# Altium PCB Chemelec Feather M0 Basic rev A_bin5.PcbDoc
Units mm, origin at the board's own origin, x right, y up, seen from the top; angles counter-clockwise.
Board outline 53.59 x 24.77 mm, 2 copper layers (Top, Bottom), stack 1.57 mm thick; 21 components, 39 nets, 123 pads, 37 vias.
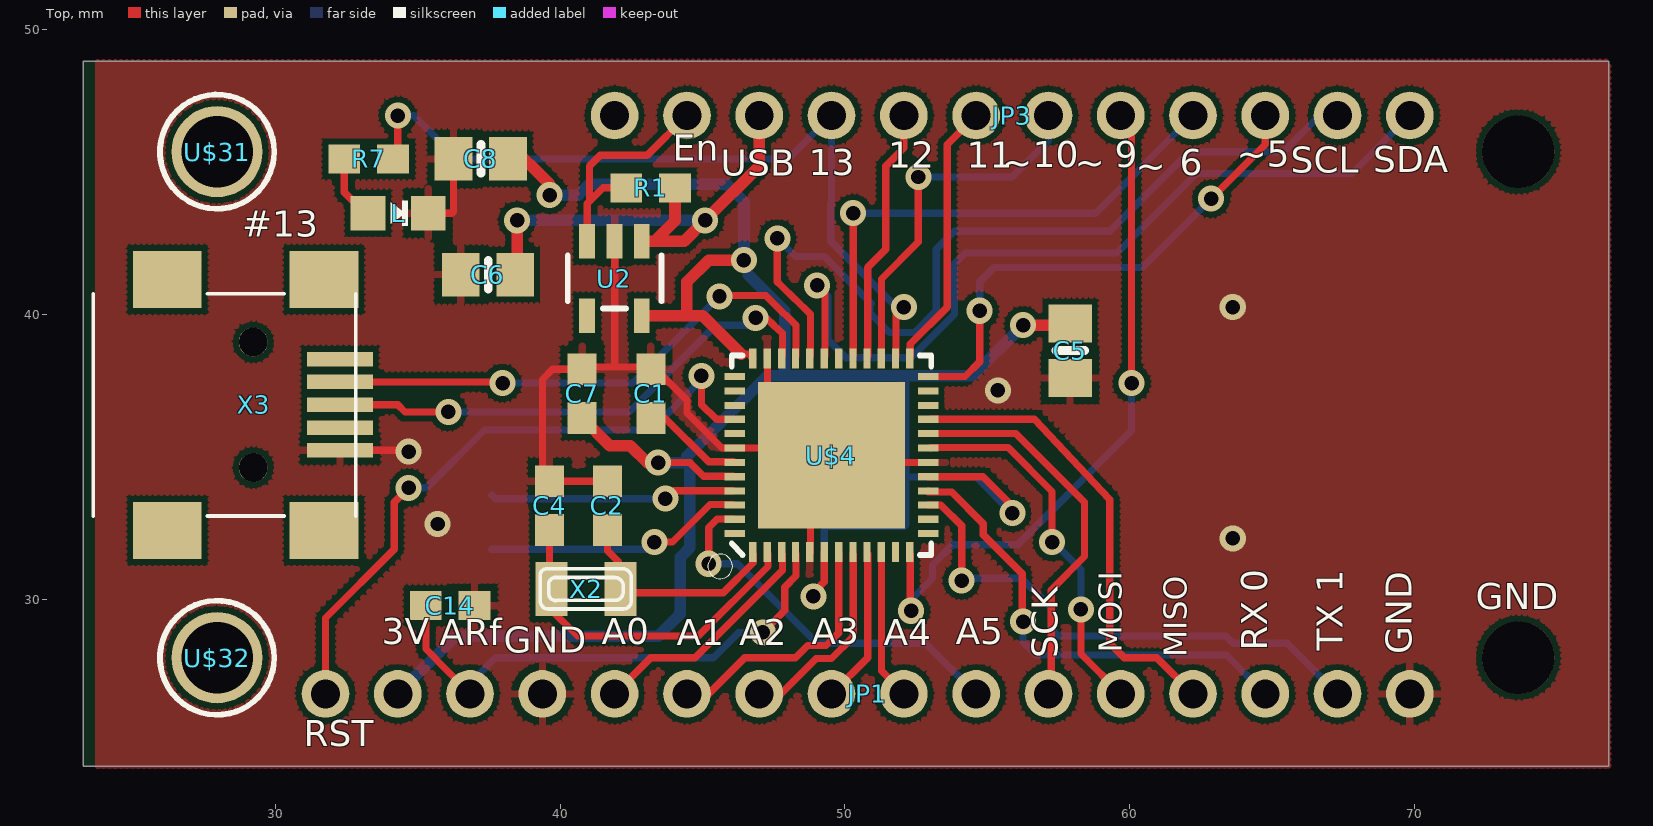
[diagram p0: Top view]
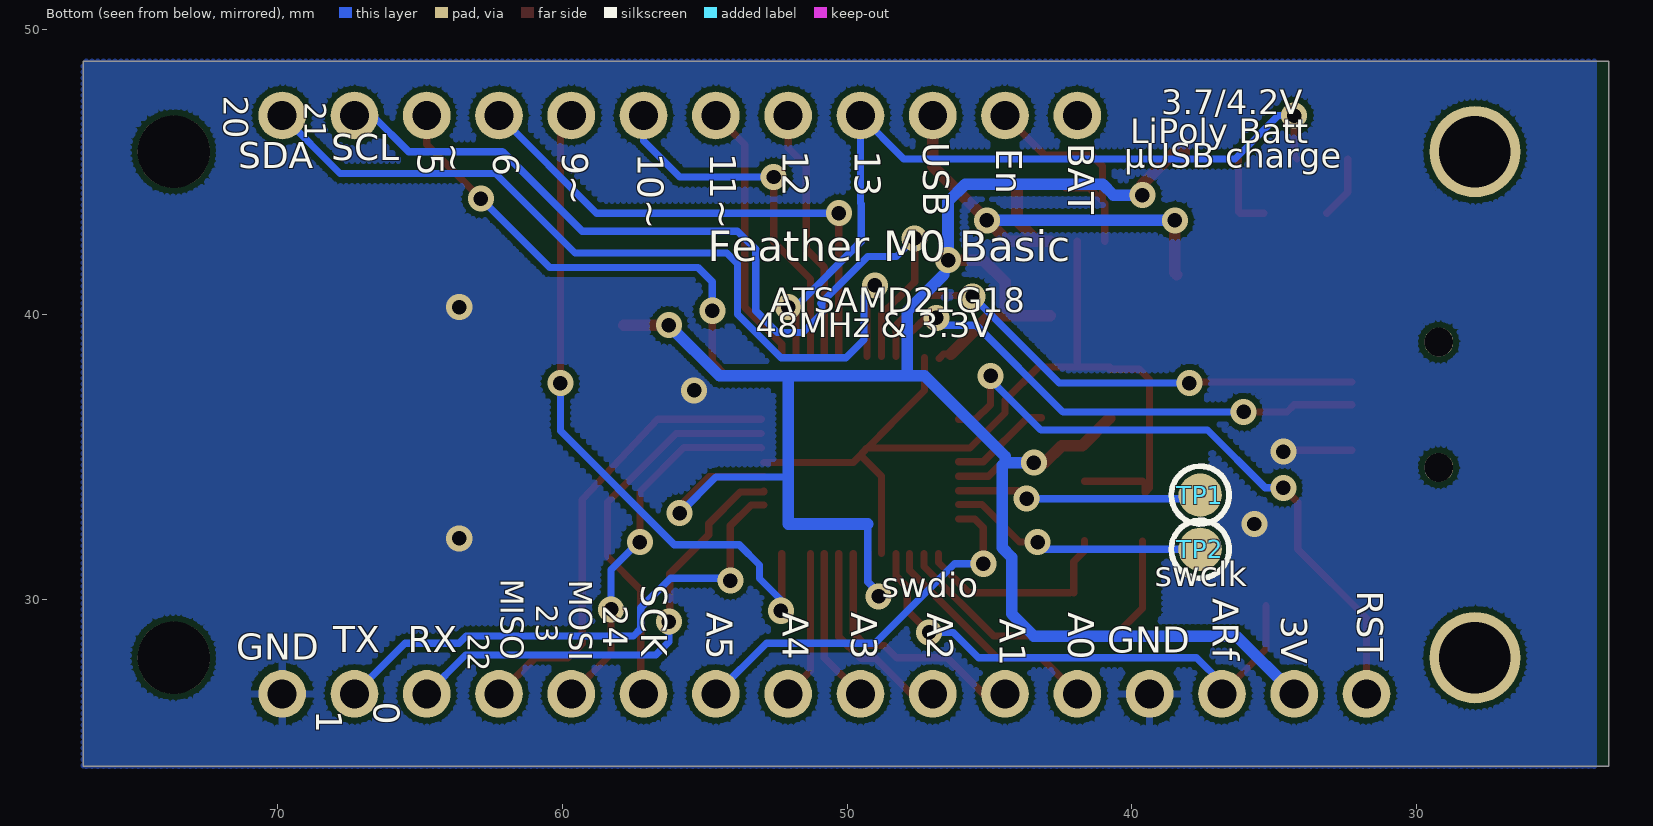
[diagram p1: Bottom view, seen from below]

## Layer stack, top to bottom
Top Solder: solder mask 0.0102, Solder Resist, Dk 3.5
Top: signal copper 0.035
Dielectric 1: core 1.5, FR-4, Dk 4.8
Bottom: signal copper 0.035
Bottom Solder: solder mask 0.0102, Solder Resist, Dk 3.5

## Board outline
23.241,48.895 76.835,48.895 76.835,25.273 76.835,24.13 75.692,24.13 23.241,24.13

## Design rules (kind name [scope] priority, off if disabled: settings)
Clearance mdViaVia [IsVia vs IsVia] p1: gap=0.203
Clearance mdPadVia [IsPad vs IsVia] p2: gap=0.203
Clearance mdPadPad [IsPad vs IsPad] p3: gap=0.203
Clearance mdWireVia [(InLayerClass('Signal Layers') AND IsTrack) vs IsVia] p4: gap=0.203
Clearance mdWirePad [(InLayerClass('Signal Layers') AND IsTrack) vs IsPad] p5: gap=0.203
Clearance mdWireWire [(InLayerClass('Signal Layers') AND IsTrack) vs (InLayerClass('Signal Layers') AND IsTrack)] p6: gap=0.203
Clearance [All] p7: gap=0.203
ComponentClearance [All] p1: gap=0.003 collisioncheckmode=3 verticalgap=0.003 showdistances=FALSE
HoleSize [All] p1: absolutevalues=TRUE maxlimit=2540 minlimit=0.394 maxpercent=80.000 minpercent=20.000
HoleToHoleClearance [All] p1: gap=0.203 allowstackedmicrovias=TRUE
MinimumSolderMaskSliver [All] p1: minsoldermaskwidth=0.127
PlaneConnect [All] p1: planeconnectstyle=Relief reliefexpansion=0.508 reliefentries=4 reliefconductorwidth=0.203 reliefairgap=0.254
PolygonConnect ThermalVias [IsVia] p1: connectstyle=Direct reliefconductorwidth=0.254 reliefentries=4 polygonreliefangle="90 Angle" airgapwidth=0.254
PolygonConnect [All] p2: connectstyle=Relief reliefconductorwidth=0.254 reliefentries=4 polygonreliefangle="90 Angle" airgapwidth=0.254
RoutingVias [All] p1: holewidth=0.711 width=1.27 viastyle="Through Hole" minholewidth=0.711 minwidth=1.27 maxholewidth=0.711 maxwidth=1.27
SilkToSilkClearance [All] p1 off: silktosilkclearance=0.254
SilkToSolderMaskClearance [IsPad] p1 off: minsilkscreentomaskgap=0.254 clearancetoexposedcopper=TRUE
SolderMaskExpansion [All] p1: expansion=0.051
Width [All] p1: maxlimit=2540 minlimit=0.203 preferedwidth=0.254
23 further rules are at their usual default settings.

## Components (designator, comment, footprint, x,y, rotation, side; value= is the part's Value field where it differs from the comment)
C1 "1uF" 0603-NO 43.18,37.211 r90 top
C2 "22pF" 0603-NO 41.656,33.274 r90 top
C4 "22pF" 0603-NO 39.624,33.274 r90 top
C5 "10uF" 0805-NO 57.912,38.735 r270 top
C6 "10µF" 0805-NO 37.465,41.402 r180 top
C7 "1uF" 0603-NO 40.767,37.211 r90 top
C8 "10µF" 0805-NO 37.211,45.466 r180 top
C14 "1uF" 0603-NO 36.119,29.769 r0 top
JP1 "HEADER-1X16ROUND" 1X16_ROUND 50.8,26.67 r180 top
JP3 "HEADER-1X12" 1X12_ROUND 55.88,46.99 r0 top
L "RED" CHIPLED_0805_NOOUTLINE 34.29,43.561 r270 top
R1 "100k" 0603-NO 43.18,44.45 r180 top
R7 "2.2K" 0603-NO 33.274,45.466 r180 top
TP1 "" TESTPOINT_ROUND_1.5MM 37.592,33.655 r180 bottom
TP2 "" TESTPOINT_ROUND_1.5MM 37.592,31.75 r180 bottom
U2 "" SOT23-5 41.91,41.275 r180 top
U$4 "ATSAMD21G18_QFN" QFN-48 49.53,35.052 r90 top
U$31 "MOUNTINGHOLE2.5" MOUNTINGHOLE_2.5_PLATED 27.94,45.72 r270 top
U$32 "MOUNTINGHOLE2.5" MOUNTINGHOLE_2.5_PLATED 27.94,27.94 r270 top
X2 "32.768" XTAL3215 40.894,30.353 r0 top
X3 "" USB-MINIB 28.194,36.83 r270 top

## Footprints (in the part's own frame and the unit in brackets; to place one, negate y for a bottom-side part, rotate by r counter-clockwise, add the part's x,y. Pads: shape width x height; smd on the part's side, far side on the other; paste and mask are expansions set on the pad)
1X12_ROUND [mil] "1X12_ROUND"
  round 66 hole 40: 1(-550,0) 2(-450,0) 3(-350,0) 4(-250,0) 5(-150,0) 6(-50,0) 7(50,0) 8(150,0) 9(250,0) 10(350,0) 11(450,0) 12(550,0)
1X16_ROUND [mil] "1X16_ROUND"
  round 66 hole 40: 1(-750,0) 2(-650,0) 3(-550,0) 4(-450,0) 5(-350,0) 6(-250,0) 7(-150,0) 8(-50,0) 9(50,0) 10(150,0) 11(250,0) 12(350,0) 13(450,0) 14(550,0) 15(650,0) 16(750,0)
0603-NO [mil] "0603-NO"
  rect 44x40 smd: 1(-33.46,0) 2(34,0)
0805-NO [mil] "0805-NO"
  rect 52x60 smd: 1(-37.4,0) 2(38,0)
  silkscreen extent 0,-20 0,20
CHIPLED_0805_NOOUTLINE [mil] "CHIPLED_0805_NOOUTLINE"
  rect 48x48 smd: A(0,-41.34) C(0,42)
  silkscreen extent -18,-10 18,14
MOUNTINGHOLE_2.5_PLATED [mil] "MOUNTINGHOLE_2.5_PLATED"
  round 126 hole 99: P$1(0,0)
  silkscreen extent -79,-79 79,79
QFN-48 [mil]
  rect 28x10 smd: 1(-133.86,109) 2(-133.86,89) 3(-133.86,69) 4(-133.86,50) 5(-133.86,30) 6(-133.86,10) 7(-133.86,-9.84) 8(-133.86,-29.53) 9(-133.86,-49.21) 10(-133.86,-68.9) 11(-133.86,-88.58) 12(-133.86,-108.27) 25(134,-108.27) 26(134,-88.58) 27(134,-68.9) 28(134,-49.21) 29(134,-29.53) 30(134,-9.84) 31(134,10) 32(134,30) 33(134,50) 34(134,69) 35(134,89) 36(134,109)
  rect 10x28 smd: 13(-108.27,-133.86) 14(-88.58,-133.86) 15(-68.9,-133.86) 16(-49.21,-133.86) 17(-29.53,-133.86) 18(-9.84,-133.86) 19(10,-133.86) 20(30,-133.86) 21(50,-133.86) 22(69,-133.86) 23(89,-133.86) 24(109,-133.86) 37(109,134) 38(89,134) 39(69,134) 40(50,134) 41(30,134) 42(10,134) 43(-9.84,134) 44(-29.53,134) 45(-49.21,134) 46(-68.9,134) 47(-88.58,134) 48(-108.27,134)
  rect 203x203 smd: EP(0,0)
  silkscreen extent -171,-138 138,171
SOT23-5 [mil] "SOT23-5"
  rect 22x48 smd: 1(-37.4,-51.18) 2(0,-51.18) 3(38,-51.18) 4(38,52) 5(-37.4,52)
  silkscreen extent -65,-31 65,42
TESTPOINT_ROUND_1.5MM [mil] "TESTPOINT_ROUND_1.5MM"
  rrect100% 60x60 smd: P$1(0,0)
  silkscreen extent -40,-40 40,40
USB-MINIB [mil]
  round 40 hole 40: 1(-86.61,40) 1(87,40)
  rect 20x91 smd: D+(0,160) D-(-31.5,160) GND(63,160) ID(32,160) VBUS(-62.99,160)
  rect 79x95 smd: GND1(-173.23,-78.74) GND2(-173.23,138) GND3(174,138) GND4(174,-78.74)
  silkscreen extent -154,-181 154,182
XTAL3215 [mil] "XTAL3215"
  rect 44x75 smd: P$1(48,0) P$2(-47.24,0)
  silkscreen extent -63,-28 63,28

## Part data
C1 C2 C4 C7 C14: library part CAP_CERAMIC0603_NO, "<p><b>Ceramic Capacitors</b></p> / <p>For new designs, use the packages preceded by an '_' character since they are more reliable:</p> / <p>The following footprints should be used on most boards:</p> / <ul> / <li><b>_0402</b> - Standard footprint for regular board layouts</li> / <li><b>_0603</b> - Standard footprint for regular board layouts</li> / <li><b>_0805</b> - Standard footprint for regular board layouts</li> / <li><b>_1206</b> - Standard footprint for regular board layouts</li> / </ul> / <p>For extremely tight-pitch boards where space is at a premium, the following 'micro-pitch' footprints can be used (smaller pads, no silkscreen outline, etc.):</p> / <ul> / <li><b>_0402MP</b> - Micro-pitch footprint for very dense/compact boards</li> / <li><b>_0603MP</b> - Micro-pitch footprint for very dense/compact boards</li> / <li><b>_0805MP</b> - Micro-pitch footprint for very dense/compact boards</li> / <li><b>_1206MP</b> - Micro-pitch footprint for very dense/compact boards</li> / </ul>"
C5 C6 C8: library part CAP_CERAMIC0805-NOOUTLINE, "<p><b>Ceramic Capacitors</b></p> / <p>For new designs, use the packages preceded by an '_' character since they are more reliable:</p> / <p>The following footprints should be used on most boards:</p> / <ul> / <li><b>_0402</b> - Standard footprint for regular board layouts</li> / <li><b>_0603</b> - Standard footprint for regular board layouts</li> / <li><b>_0805</b> - Standard footprint for regular board layouts</li> / <li><b>_1206</b> - Standard footprint for regular board layouts</li> / </ul> / <p>For extremely tight-pitch boards where space is at a premium, the following 'micro-pitch' footprints can be used (smaller pads, no silkscreen outline, etc.):</p> / <ul> / <li><b>_0402MP</b> - Micro-pitch footprint for very dense/compact boards</li> / <li><b>_0603MP</b> - Micro-pitch footprint for very dense/compact boards</li> / <li><b>_0805MP</b> - Micro-pitch footprint for very dense/compact boards</li> / <li><b>_1206MP</b> - Micro-pitch footprint for very dense/compact boards</li> / </ul>"
JP1: "<b>PIN HEADER</b>"
L: library part LED0805_NOOUTLINE, "<p><b>LED</b></p> / <b>0603</b> - 0603 Surface Mount Package / <hr> / <p><b><u>2mA:</u></b></p> / <ul> / <li>Green LED - Low Power (3.9mcd, 2ma, 1.7Vf) - Digikey: 475-2709-2-ND</li> / <li>Orange LED - Low Power (9.8mcd, 2ma, 1.8Vf) - Digikey: 475-1194-2-ND</li> / <li>Red LED - Low Power (5mcd, 2ma, 1.8Vf) - Digikey: 475-1195-2-ND</li> / <li>Yellow LED - Low Power (7mcd, 2ma, 1.8Vf) - Digikey: 475-1196-2-ND</li> / </ul> / <p><b><u>5mA:</u></b></p> / <ul> / <li>Blue LED - Low Power (17mcd, 5ma, 2.9Vf) - Digikey: LNJ937W8CRACT-ND</li> / </ul> / <b>0805</b> - 0805 Surface Mount Package / <hr> / <p><b><u>2mA:</u></b></p> / <ul> / <li>Red LED (8.8mcd, 2mA, 1.8Vf, Clear) - Low Power [Digikey: 475-2510-1-ND]</li> / <li>Green LED (5mcd, 2mA, 1.8Vf, Clear) - Low Power [Digikey: 475-2730-1-ND]</li> / <li>Yellow LED (11.3mcd, 2mA, 1.8Vf, Clear) - Low Power [Digikey: 475-2555-1-ND]</li> / </ul> / <p><b><u>20mA:</u></b></p> / <ul> / <li>Red LED (104mcd, 20mA, Diffused) - LS R976 [Digikey: 475-1278-6-ND]</li> / <li>Red LED (12mcd, 20mA, 2.0Vf, Clear) - APT2012EC [Digikey: 754-1128-1-ND]</li> / <li>Green LED (15mcd, 20mA, 2.2Vf, Clear) - APT2012GC [Digikey: 754-1131-1-ND]</li> / <li>Orange LED (160mcd, 20mA, 2.1Vf, Clear) - APT2012SECK [Digikey: 754-1130-1-ND]</li> / </ul> / <li><b>1206</b> - 1206 Surface Mount Package / <hr> / <ul> / <li>Green LED (26mcd, 20mA, Diffused) - LG N971  [Digikey: 475-1407-6-ND]</li> / <li>Red LED (15mcd, 20mA, Diffused) - LH N974 [Digikey: 475-1416-6-ND]</li> / </ul> /  / <li><b>Cree</b> - Cree High-Power Surface Mount LEDs / <hr> / <ul> / <li>XPEBWT-L1-0000-00D50 - White 111lm 350mA 2.9Vf 6200K 110°</li> / <li>XTEAWT-00-0000-00000LEE3 - White 114lm 350mA 2.85Vf 5000K 115°</li> / </ul> /  / <li><b>Everlight</b> - Everlight 45-21 Series Surface Mount LEDs / <hr> / <ul> / <li>45-21/QK2C-B2832AC2CB2/2T - Warm White 2000mcd 20mA 3.25Vf 3050K 120°</li> / <li>45-21/LK2C-B38452C4CB2/2T - Nuetral White 2000mcd 20mA 3.25Vf 4150K 120°</li> / <li>45-21/LK2C-B50634C6CB2/2T - Cold White 2200mcd 20mA 3.25Vf 5650K 120°</li> / </ul> /  / <li><b>PLCC2 Reverse Mount</b> / <hr> / <ul> / <li>LS T77K-J1L2-1-0-2-R18-Z - Red 11.25mcd 2mA 1.8Vf 630nm 120°</li> / <li>LO T77K-L1M2-24-Z - Orange 19.6mcd 2mA 1.8Vf 606nm 120°</li> / <li>LY T77K-K2M1-26-Z - Yellow 15.7mcd 2mA 1.8Vf 587nm 120°</li> / </ul>"
R1 R7: library part RESISTOR_0603_NOOUT, "<p><b>Resistors</b></p> / <p>For new designs, use the packages preceded by an '_' character since they are more reliable:</p> / <p>The following footprints should be used on most boards:</p> / <ul> / <li><b>_0402</b> - Standard footprint for regular board layouts</li> / <li><b>_0603</b> - Standard footprint for regular board layouts</li> / <li><b>_0805</b> - Standard footprint for regular board layouts</li> / <li><b>_1206</b> - Standard footprint for regular board layouts</li> / </ul> / <p>For extremely tight-pitch boards where space is at a premium, the following 'micro-pitch' footprints can be used (smaller pads, no silkscreen outline, etc.):</p> / <ul> / <li><b>_0402MP</b> - Micro-pitch footprint for very dense/compact boards</li> / <li><b>_0603MP</b> - Micro-pitch footprint for very dense/compact boards</li> / <li><b>_0805MP</b> - Micro-pitch footprint for very dense/compact boards</li> / <li><b>_1206MP</b> - Micro-pitch footprint for very dense/compact boards</li> / </ul>"
TP1 TP2: library part TESTPOINTROUND1.5MM
U2: library part VREG_SOT23-5
U$4: library part ATSAMD21G-M
U$31 U$32: "<b>Mounting Hole</b> / <p>For #2 screws (0.086\"/2.18mm width, 0.094\"/2.4mm hole) use 2.5mm</p>"
X2: library part XTAL-3.2X1.5, "Low cost SMT crystals, no capacitors included / <p>http://www.ladyada.net/library/eagle</p>"
X3: library part USBMINIB

## Free pads (board coordinates)
  round 2.54 hole 2.54: 1(73.66,27.94) 1(73.66,45.72)

## Via types
v1: diameter 0.914/0.914 (per signal layer), hole 0.508, Top to Bottom, 34 vias
v2: diameter 0.914, hole 0.508, Top to Bottom, 3 vias

## Nets (pads, with @x,y where several pads share a name; then routed paths per layer and width w, separated by ;. In a path a pad name is that pad's centre, name@x,y a point inside that pad or via, vN(x,y) a via of type N, cw(c..) or ccw(c..) an arc to the next point about the centre after c; other vN are vias at no path point)
+3V3: C5.1 C7.1 C8.1 JP1.15 U2.5 U$4.6 U$4.17 U$4.36 U$4.44 | length 84.6
  Top w0.254: v1(43.434,34.798) 44.577,34.798 44.564,34.785 45.034,34.315 U$4.44@46.076,34.315 ; 46.355,38.608 46.609,38.608 U$4.36 ; v1(48.895,30.099) 48.895,30.226 49.276,30.607 U$4.6 ; U$4.17 54.852,34.302 55.88,33.274 v1(55.88,33.02)
  Top w0.406: C8.1 38.161,46.04 39.624,44.577 v1(39.624,44.196) ; C7.1 41.739,35.389 42.462,35.389 43.053,34.798 v1(43.434,34.798) ; U2.5 44.45,39.954 ; 46.355,38.608 45.009,39.954 44.45,39.954 ; v1(46.453,41.91) 45.212,41.91 44.45,41.148 44.45,39.954 ; v1(56.261,39.624) C5.1@57.851,39.624
  Bottom w0.254: v1(46.453,41.91) 46.453,41.558 46.609,41.402 ; v1(48.895,30.099) 48.895,30.226 49.276,30.607 49.276,32.639 ; 52.07,34.29 54.61,34.29 v1(55.88,33.02)
  Bottom w0.406: JP1.15 36.322,28.702 43.434,28.702 44.221,29.489 44.221,31.473 44.552,31.803 44.552,34.696 44.45,34.798 ; v1(39.624,44.196) 40.64,44.196 41.021,44.577 45.847,44.577 46.453,43.971 v1(46.453,41.91) ; v1(43.434,34.798) 44.45,34.798 ; 46.609,41.402 47.879,40.132 47.879,37.973 ; 49.276,32.639 52.07,32.639 52.07,34.29 52.07,37.846 ; v1(56.261,39.624) 54.483,37.846 52.07,37.846 ; 44.45,34.798 44.45,35.016 47.28,37.846 52.07,37.846
A0: JP1.12 U$4.3 | length 8.3
  Top w0.254: JP1.12 43.18,27.94 44.733,27.94 47.803,31.009 U$4.3@47.803,31.598
A1: JP1.11 U$4.7 | length 9
  Top w0.254: JP1.11 45.212,26.67 46.482,27.94 48.26,27.94 48.692,28.372 49.338,28.372 49.784,28.817 U$4.7@49.784,31.598
A2: JP1.10 U$4.8 | length 7.3
  Top w0.254: JP1.10@47.244,26.67 JP1.10 47.752,26.67 48.997,27.915 49.528,27.915 50.292,28.679 U$4.8@50.292,31.598
A3: JP1.9 U$4.9 | length 5.5
  Top w0.254: JP1.9 50.8,27.94 U$4.9@50.8,31.598
A4: JP1.8 U$4.10 | length 5.2
  Top w0.254: U$4.10@51.283,31.598 51.283,27.483 JP1.8
A5: JP1.7 U$4.47 | length 13.9
  Top w0.254: v1@45.339,30.988 45.212,31.115 45.212,32.512 45.517,32.817 U$4.47@46.076,32.817
  Bottom w0.254: v1(45.212,31.242) 46.228,31.242 49.022,28.448 52.832,28.448 JP1.7
AREF: C14.1 JP1.14 U$4.4 | length 19.2
  Top w0.254: C14.1@35.281,29.769 35.281,28.245 JP1.14 ; v1(47.117,28.829) 47.885,29.597 47.885,30.416 48.285,30.817 U$4.4@48.285,31.598
  Bottom w0.254: JP1.14@36.83,27.178 JP1.14 36.83,27.051 37.719,27.94 45.381,27.94 46.27,28.829 v1(47.117,28.829) v1@47.117,29.103
D0: JP1.3 U$4.16 | length 16.4
  Top w0.254: U$4.16 52.93,33.759 53.755,33.759 54.864,32.651 54.864,32.258 56.231,30.891 56.231,29.24 v1(56.261,29.21)
  Bottom w0.254: v1(56.261,29.21) 56.261,28.499 56.724,28.036 63.404,28.036 JP1.3
D1: JP1.2 U$4.15 | length 18.8
  Top w0.254: U$4.15 53.38,33.302 54.102,32.58 v1(54.102,30.653)
  Bottom w0.254: v1(54.102,30.653) 54.102,30.734 56.205,30.734 57.246,29.693 57.246,28.963 57.507,28.702 63.385,28.702 63.639,28.448 65.532,28.448 JP1.2
D2: U$4.23
D3: U$4.14
D4: U$4.13
D5: JP3.10 U$4.24 | length 17.8
  Top w0.254: U$4.24@53.01,37.821 54.218,37.821 54.737,38.339 v1(54.737,40.132) ; v1(62.865,44.069) 64.77,45.974 JP3.10
  Bottom w0.254: v1(54.737,40.132) 54.737,41.148 55.245,41.656 60.452,41.656 v1(62.865,44.069)
D6: JP3.9 U$4.29 | length 18.7
  Top w0.254: U$4.29@50.292,38.532 50.292,43.151 50.546,43.405 50.39,43.561 v1(50.292,43.561)
  Bottom w0.254: v1(50.292,43.561) 58.801,43.561 JP3.9
D7: U$4.30
D8: U$4.11
D9: JP3.8 U$4.12 | length 24.1
  Top w0.254: U$4.12@52.299,31.598 52.299,29.616 v1(52.324,29.591) ; JP3.8 60.071,46.609 v1(60.071,37.592)
  Bottom w0.254: v1(52.324,29.591) 52.324,29.972 53.076,30.724 53.076,31.203 53.786,31.913 56.072,31.913 60.071,35.912 v1(60.071,37.592)
D10: JP3.7 U$4.27 | length 13
  Top w0.254: U$4.27@51.283,38.532 51.283,41.25 52.578,42.545 v1(52.578,44.831)
  Bottom w0.254: v1(52.578,44.831) 55.88,44.831 57.15,46.101 JP3.7 JP3.7@57.023,46.863
D11: JP3.6 U$4.25 | length 10.1
  Top w0.254: U$4.25@52.299,38.532 52.299,38.964 53.594,40.259 53.594,45.974 JP3.6
  Bottom w0.254: JP3.6@53.975,46.99 JP3.6
D12: JP3.5 U$4.28 | length 9.5
  Top w0.254: U$4.28@50.8,38.532 50.8,41.656 51.435,42.291 51.435,45.212 52.07,45.847 JP3.5
  Bottom w0.254: JP3.5@51.562,46.99 JP3.5
D13: JP3.4 R7.1 U$4.26 | length 28.1
  Top w0.254: R7.1@34.188,45.466 34.29,45.568 v1(34.29,46.99) ; U$4.26@51.791,38.532 51.791,39.98 v1(52.07,40.259)
  Bottom w0.254: v1(34.29,46.99) 34.849,46.99 36.373,45.466 48.006,45.466 JP3.4 ; JP3.4@49.022,46.99 49.53,46.482 49.53,43.913 49.505,43.887 49.505,42.57 51.816,40.259 v1(52.07,40.259)
D+: U$4.34 X3.D+ | length 18
  Top w0.254: X3.D+ 34.29,36.83 34.544,36.576 v1(36.068,36.576) ; v1(46.863,39.878) 47.244,39.878 47.498,39.624 47.803,39.345 U$4.34@47.803,38.532
  Bottom w0.254: v1(36.068,36.576) 42.418,36.576 45.466,39.624 46.609,39.624 v1(46.863,39.878)
D-: U$4.33 X3.D- | length 18.7
  Top w0.254: X3.D- v1@37.681,37.63 ; v1(45.593,40.64) 45.593,40.513 45.745,40.665 47.222,40.665 47.502,40.386 48.285,39.624 U$4.33@48.285,38.532
  Bottom w0.254: v1(37.973,37.592) 42.545,37.592 v1(45.593,40.64)
EN: JP3.2 R1.2 U2.3 | length 8.3
  Top w0.254: U2.3 40.945,43.895 41.021,43.971 ; R1.2 41.5,44.45 41.021,43.971 ; JP3.2 43.053,45.593 41.402,45.593 41.021,45.212 41.021,43.971
GND: C1.2 C2.2 C4.2 C5.2 C6.2 C7.2 C8.2 C14.2 JP1.1 JP1.13 L.C U2.2 U$4.5 U$4.18 U$4.35 U$4.42 U$4.EP X3.GND | length 39
  Top w0.254: X3.GND v1@34.62,35.23 ; L.C 36.195,43.561 36.246,43.612 C8.2 ; C7.2 39.726,38.075 39.37,37.719 39.37,33.909 39.522,33.757 39.522,34.036 C4.2 C2.2 ; C7.2@40.767,38.151 41.91,38.151 ; U2.2 41.91,38.151 ; C1.2@43.104,38.151 41.91,38.151 ; C1.2@43.282,38.151 44.448,36.984 44.448,36.543 45.685,35.306 U$4.42 U$4.EP@49.279,35.306 ; U$4.35@47.28,38.477 47.28,37.327 U$4.EP@48.436,36.171 ; U$4.EP@48.436,36.158 U$4.EP@49.279,35.306 ; U$4.5@48.793,31.598 48.793,34.315 U$4.EP ; U$4.18 49.78,34.802 U$4.EP ; U$4.EP@49.279,35.306 49.301,35.306 U$4.EP
  other v1: 35.687,32.639 34.671,35.179
  other v2: 63.627,32.131 55.372,37.338 63.627,40.259
MISO: JP1.4 U$4.21 | length 16.2
  Top w0.254: U$4.21@53.01,36.322 56.657,36.322 59.309,33.504 59.309,28.448 59.817,27.94 60.96,27.94 JP1.4
MOSI: JP1.5 U$4.19 | length 13.1
  Top w0.254: U$4.19@53.01,35.306 53.035,35.331 55.728,35.331 57.277,33.782 v1(57.277,32.004) ; v1(58.293,29.638) 58.293,28.067 JP1.5
  Bottom w0.254: v1(57.277,32.004) 57.277,32.049 58.293,31.033 v1(58.293,29.638)
NetC2_1: C2.1 U$4.1 X2.P$1 | length 7.4
  Top w0.254: C2.1@41.656,32.055 41.656,31.699 42.037,31.318 X2.P$1@42.037,30.226 ; X2.P$1@42.164,30.226 45.726,30.226 46.787,31.287 U$4.1@46.787,31.598
NetC4_1: C4.1 U$4.2 X2.P$2 | length 11.9
  Top w0.254: C4.1@39.624,32.043 39.624,29.678 40.6,28.702 44.849,28.702 47.295,31.148 U$4.2@47.295,31.598
NetL_A: L.A R7.2 | length 2.2
  Top w0.254: R7.2 32.41,44.298 L.A@33.147,43.561
R\E\S\E\T\: JP1.16 U$4.40 | length 22.9
  Top w0.254: JP1.16@31.877,26.67 JP1.16 31.75,29.337 34.163,31.75 34.163,33.401 v1(34.671,33.909) ; v1(44.958,37.846) 44.958,36.83 45.491,36.322 U$4.40@46.076,36.322
  Bottom w0.254: v1(34.671,33.909) 35.306,33.909 37.338,35.941 43.191,35.941 44.958,37.708 v1(44.958,37.846)
SCK: JP1.6 U$4.20 | length 13.7
  Top w0.254: U$4.20@53.01,35.814 56.007,35.814 58.42,33.401 58.42,31.496 57.246,30.322 57.246,26.766 JP1.6
SCL: JP3.11 U$4.32 | length 31.4
  Top w0.254: 47.625,41.529 v1(47.625,42.672) 47.625,41.148 47.752,41.021 48.793,40.005 U$4.32@48.793,38.532
  Bottom w0.254: v1(47.625,42.672) 48.26,42.037 49.276,42.037 50.927,40.386 ; 50.878,40.337 50.878,40.054 51.562,39.37 52.451,39.37 53.213,40.132 53.213,42.291 53.848,42.926 59.309,42.926 62.103,45.72 65.405,45.72 66.675,46.99 JP3.11
SDA: JP3.12 U$4.31 | length 30
  Top w0.254: v1(49.022,41.021) 49.301,40.767 U$4.31@49.301,38.532
  Bottom w0.254: v1(49.022,41.021) 49.403,40.64 49.403,39.116 50.038,38.481 52.324,38.481 53.848,40.005 53.848,41.783 54.229,42.164 59.563,42.164 62.357,44.958 67.818,44.958 JP3.12
SWCLK: TP1.P$1 U$4.45 | length 9
  Top w0.254: v1@43.561,33.807 U$4.45@46.076,33.807 ; v1(43.688,33.528) 43.561,33.528 v1@43.688,33.655
  Bottom w0.254: TP1.P$1 37.719,33.528 v1(43.688,33.528)
SWDIO: TP2.P$1 U$4.46 | length 9.1
  Top w0.254: v1(43.307,32.004) 43.942,32.004 45.263,33.325 U$4.46@46.076,33.325
  Bottom w0.254: TP2.P$1 43.053,31.75 v1(43.307,32.004)
VBUS: C6.1 JP3.3 R1.1 U2.1 | length 17.7
  Top w0.406: C6.1 38.481,41.468 v1(38.481,43.307) ; U2.1 43.307,42.575 ; R1.1 44.03,43.298 43.307,42.575 ; JP3.3 46.99,45.212 v1(45.085,43.307) 44.353,42.575 43.307,42.575
  Bottom w0.406: v1(38.481,43.307) v1(45.085,43.307)
VDDCORE: C1.1 U$4.43 | length 3.5
  Top w0.254: C1.1@43.18,36.373 43.663,36.373 45.212,34.823 U$4.43@46.076,34.823
pads on no net: JP3.1 U2.4 U$4.22 U$4.37 U$4.38 U$4.39 U$4.41 U$4.48 U$31.P$1 U$32.P$1 X3.1 X3.GND1 X3.GND2 X3.GND3 X3.GND4 X3.ID X3.VBUS

## Polygon pours and split planes (outlines as drawn)
GND on Bottom "bottom" (hatched 90Degree grid 0.203 track 0.203, remove dead copper, pour order 8): 23.749,48.895 23.749,24.13 74.168,24.13 76.835,24.13 76.835,29.845 76.835,48.895
GND on Top "Top" (hatched 90Degree grid 0.203 track 0.203, remove dead copper, pour order 6): 23.749,48.879 23.749,24.13 75.311,24.13 75.692,24.13 76.835,24.13 76.835,25.654 76.835,48.895

## Other copper
Top:
  pour cut-out: 40.132,34.671 41.148,34.671 41.148,31.496 41.529,31.496 41.529,29.337 40.259,29.337 40.259,31.877 40.132,31.877
  pour cut-out: 42.164,34.798 42.164,31.496 44.45,31.496 44.577,31.623 44.323,31.877 44.323,34.798
Bottom:
  pour cut-out: 38.866,31.421 38.921,31.477 42.926,31.477 42.926,29.483 42.969,29.44 42.842,29.313 38.866,29.313
  pour cut-out: 40.259,31.496 43.942,31.496 43.942,29.21 43.688,28.956 38.989,28.956 38.989,29.312 38.866,29.435 39.022,29.591 40.259,29.591
  pour cut-out: 37.211,35.814 43.434,35.814 43.434,33.782 37.211,33.782

## Silkscreen, mask and mechanical layers (free items; w line width, h text height)
Top Overlay:
  text "En" at 43.946,45.089 h1.57
  text "10" at 56.603,44.859 h1.57
  text "9" at 59.485,44.859 h1.57
  text "~5" at 63.77,44.867 h1.57
  text "12" at 51.526,44.832 h1.57
  text "11" at 54.286,44.832 h1.57
  text "SDA" at 68.559,44.69 h1.57
  text "SCL" at 65.659,44.66 h1.57
  text "13" at 48.727,44.57 h1.57
  text "~" at 55.528,44.584 h1.57
  text "~" at 58.068,44.584 h1.57
  text "6" at 61.769,44.57 h1.57
  text "USB" at 45.633,44.563 h1.57
  text "~" at 60.227,44.457 h1.57
  text "#13" at 28.829,42.418 h1.57
  text "0" at 65.151,30.247 h1.57 r90
  text "1" at 67.802,30.226 h1.57 r90
  text "GND" at 72.169,29.323 h1.57
  text "RX" at 65.163,28.194 h1.57 r90
  text "TX" at 67.802,28.194 h1.57 r90
  text "MOSI" at 59.989,28.116 h1.38 r90
  text "3V" at 33.717,28.095 h1.57
  text "A0" at 41.461,28.095 h1.57
  text "A3" at 48.826,28.095 h1.57
  text "A5" at 53.902,28.097 h1.57
  text "ARf" at 35.757,28.062 h1.57
  text "A1" at 44.098,28.068 h1.57
  text "A2" at 46.291,28.068 h1.57
  text "A4" at 51.368,28.071 h1.57
  text "GND" at 70.238,28.067 h1.57 r90
  text "MISO" at 62.275,27.961 h1.38 r90
  text "SCK" at 57.799,27.921 h1.57 r90
  text "GND" at 38.006,27.799 h1.57
  text "RST" at 30.988,24.511 h1.57
Bottom Overlay:
  text "20" at 71.909,47.686 h0.86 r90
  text "21" at 69.048,47.457 h0.76 r90
  text "3.7/4.2V" at 38.965,47.03 h0.86
  text "USB" at 47.639,46.061 h1.57 r90
  text "LiPoly Batt" at 40.044,46.023 h0.86
  text "BAT" at 42.541,46.009 h1.57 r90
  text "En" at 45.081,45.843 h1.57 r90
  text "13" at 50.045,45.761 h1.57 r90
  text "12" at 52.577,45.756 h1.57 r90
  text "9~" at 60.332,45.703 h1.57 r90
  text "11~" at 55.117,45.667 h1.57 r90
  text "10~" at 57.665,45.667 h1.57 r90
  text "6" at 62.745,45.673 h1.57 r90
  text "5" at 65.404,45.674 h1.57 r90
  text "µUSB charge" at 40.26,45.159 h0.86
  text "SCL" at 68.116,45.106 h1.57
  text "~" at 63.134,44.987 h1.57 r270
  text "SDA" at 71.395,44.817 h1.57
  text "Feather M0 Basic" at 54.896,41.865 h1.08
  text "ATSAMD21G18" at 52.706,40.071 h0.86
  text "48MHz & 3.3V" at 53.209,39.207 h0.86
  text "MISO" at 62.432,30.713 h1.38 r90
  text "MOSI" at 60.019,30.685 h1.38 r90
  text "SCK" at 57.545,30.499 h1.57 r90
  text "swclk" at 39.185,30.453 h0.86
  text "RST" at 32.399,30.296 h1.57 r90
  text "swdio" at 48.782,30.072 h0.86
  text "ARf" at 37.47,30.029 h1.57 r90
  text "23" at 60.92,29.803 h0.76 r90
  text "24" at 58.574,29.779 h0.86 r90
  text "A0" at 42.552,29.532 h1.57 r90
  text "A2" at 47.497,29.528 h1.57 r90
  text "A3" at 50.172,29.533 h1.57 r90
  text "A4" at 52.574,29.531 h1.57 r90
  text "A5" at 55.25,29.537 h1.57 r90
  text "3V" at 35.059,29.402 h1.57 r90
  text "A1" at 44.957,29.308 h1.57 r90
  text "22" at 63.333,28.787 h0.76 r90
  text "RX" at 65.435,27.817 h1.57
  text "TX" at 68.062,27.817 h1.57
  text "GND" at 40.861,27.799 h1.57
  text "GND" at 71.468,27.545 h1.57
  text "1" at 68.96,26.094 h1.57 r90
  text "0" at 65.398,25.579 h1.57 r270
Dimension:
  pour cut-out: 42.164,34.798 44.45,34.798 44.704,34.544 44.704,31.623 42.164,31.623

## Text inside footprints (layer, text, board x,y; h text height)
L: tDocu "A" at 32.89,43.661 h0.39 r270; tDocu "C" at 35.509,43.661 h0.39 r270